# Altium PCB 175-00065revA - PCB, Sinistro Camera Controller Extension.PcbDoc
Units mil, origin at the board's own origin, x right, y up, seen from the top; angles counter-clockwise.
Board outline 6000 x 4000 mil, 2 copper layers (Top Layer, Bottom Layer), stack 12.8 mil thick; 32 components, 37 nets, 107 pads, 0 vias.
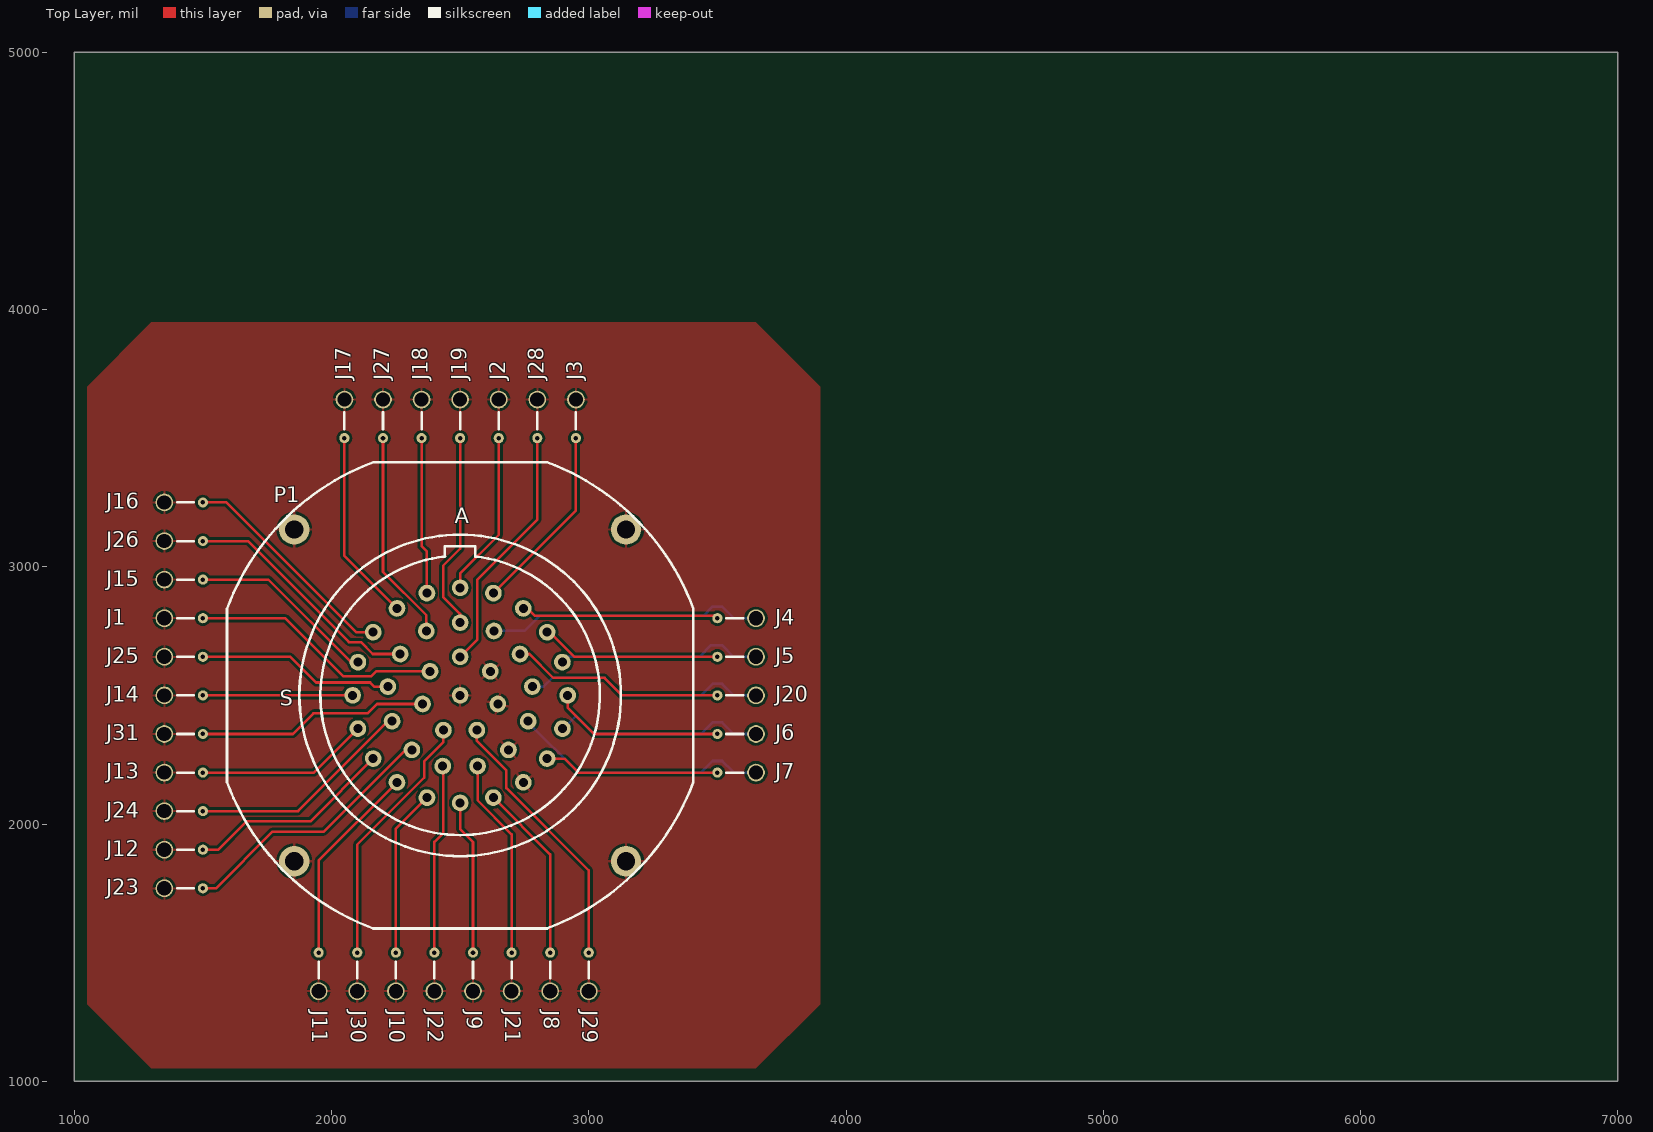
[diagram p0: Top Layer view]
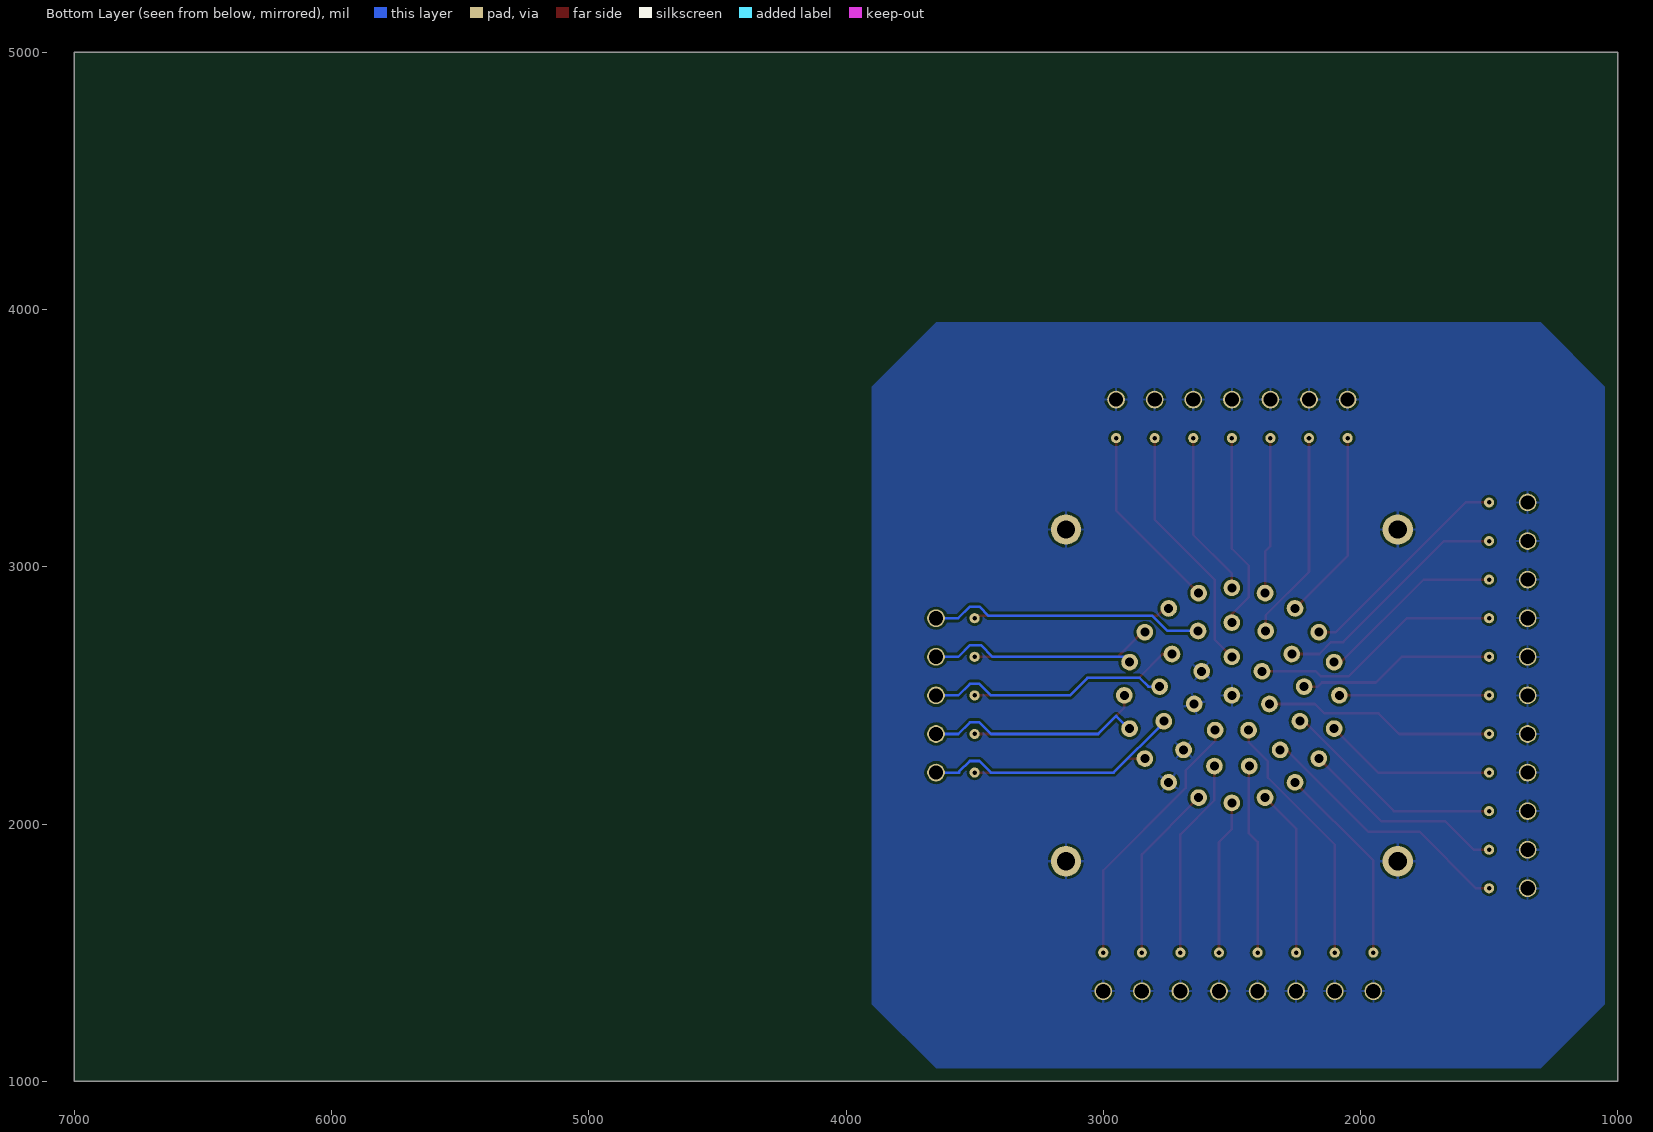
[diagram p1: Bottom Layer view, seen from below]

## Layer stack, top to bottom
Top Solder: solder mask 0.4, Solder Resist, Dk 3.5
Top Layer: signal copper 1.4
Dielectric 1: core 10, FR-4, Dk 4.2
Bottom Layer: signal copper 1.4
Bottom Solder: solder mask 0.4, Solder Resist, Dk 3.5

## Board outline
1000,1000 7000,1000 7000,5000 1000,5000

## Design rules (kind name [scope] priority, off if disabled: settings)
Clearance [All] p1: gap=10
PolygonConnect [All] p1: connectstyle=Relief reliefconductorwidth=10 reliefentries=4 polygonreliefangle="90 Angle" airgapwidth=10
RoomDefinition "780-00059revA - SCH, Sinistro Camera Controller Extension" [InComponentClass('780-00059revA - SCH, Sinistro Camera Controller Extension')] p1: confinementstyle=ConfineIn formatcopy=TRUE lockcomponents=TRUE outline 1000,1000 3950,1000 3950,4000 1000,4000
RoutingVias [All] p1: holewidth=28 width=50 viastyle="Through Hole" minholewidth=28 minwidth=50 maxholewidth=28 maxwidth=50
SolderMaskExpansion [All] p1: expansion=4
Width [All] p1: maxlimit=10 minlimit=10 preferedwidth=10
30 further rules are at their usual default settings.

## Components (designator, comment, footprint, x,y, rotation, side; value= is the part's Value field where it differs from the comment)
J1 "RG-178_CoaxTermination" RG-178_TERMINATION 1350,2800 r0 top
J2 "RG-178_CoaxTermination" RG-178_TERMINATION 2650,3650 r270 top
J3 "RG-178_CoaxTermination" RG-178_TERMINATION 2950,3650 r270 top
J4 "RG-178_CoaxTermination" RG-178_TERMINATION 3650,2800 r180 top
J5 "RG-178_CoaxTermination" RG-178_TERMINATION 3650,2650 r180 top
J6 "RG-178_CoaxTermination" RG-178_TERMINATION 3650,2350 r180 top
J7 "RG-178_CoaxTermination" RG-178_TERMINATION 3650,2200 r180 top
J8 "RG-178_CoaxTermination" RG-178_TERMINATION 2850,1350 r90 top
J9 "RG-178_CoaxTermination" RG-178_TERMINATION 2550,1350 r90 top
J10 "RG-178_CoaxTermination" RG-178_TERMINATION 2250,1350 r90 top
J11 "RG-178_CoaxTermination" RG-178_TERMINATION 1950,1350 r90 top
J12 "RG-178_CoaxTermination" RG-178_TERMINATION 1350,1900 r0 top
J13 "RG-178_CoaxTermination" RG-178_TERMINATION 1350,2200 r0 top
J14 "RG-178_CoaxTermination" RG-178_TERMINATION 1350,2500 r0 top
J15 "RG-178_CoaxTermination" RG-178_TERMINATION 1350,2950 r0 top
J16 "RG-178_CoaxTermination" RG-178_TERMINATION 1350,3250 r0 top
J17 "RG-178_CoaxTermination" RG-178_TERMINATION 2050,3650 r270 top
J18 "RG-178_CoaxTermination" RG-178_TERMINATION 2350,3650 r270 top
J19 "RG-178_CoaxTermination" RG-178_TERMINATION 2500,3650 r270 top
J20 "RG-178_CoaxTermination" RG-178_TERMINATION 3650,2500 r180 top
J21 "RG-178_CoaxTermination" RG-178_TERMINATION 2700,1350 r90 top
J22 "RG-178_CoaxTermination" RG-178_TERMINATION 2400,1350 r90 top
J23 "RG-178_CoaxTermination" RG-178_TERMINATION 1350,1750 r0 top
J24 "RG-178_CoaxTermination" RG-178_TERMINATION 1350,2050 r0 top
J25 "RG-178_CoaxTermination" RG-178_TERMINATION 1350,2650 r0 top
J26 "RG-178_CoaxTermination" RG-178_TERMINATION 1350,3100 r0 top
J27 "RG-178_CoaxTermination" RG-178_TERMINATION 2200,3650 r270 top
J28 "RG-178_CoaxTermination" RG-178_TERMINATION 2800,3650 r270 top
J29 "RG-178_CoaxTermination" RG-178_TERMINATION 3000,1350 r90 top
J30 "RG-178_CoaxTermination" RG-178_TERMINATION 2100,1350 r90 top
J31 "RG-178_CoaxTermination" RG-178_TERMINATION 1350,2350 r0 top
P1 "125-00409 - MIL-DTL-26482 20-41 Pins, Jam nut" "MS-3116 Size 20-41, Male" 2500,2500 r0 top

## Footprints (in the part's own frame and the unit in brackets; to place one, negate y for a bottom-side part, rotate by r counter-clockwise, add the part's x,y. Pads: shape width x height; smd on the part's side, far side on the other; paste and mask are expansions set on the pad)
"MS-3116 Size 20-41, Male" [mil] "Round Size 20, 41 pos, Male Pins"
  round 65 hole 35: A(0,418) aa(280.94,34.1) B(129.17,397.54) bb(264.6,-100.37) C(245.69,338.17) cc(187.65,-211.84) D(338.17,245.69) dd(67.72,-274.78) E(397.54,129.17) ee(-67.74,-274.77) F(418,0) ff(-187.67,-211.82) G(397.54,-129.17) gg(-264.61,-100.35) H(338.17,-245.69) hh(-280.94,34.12) ii(-232.9,160.76) J(245.69,-338.17) jj(-131.52,250.58) K(129.17,-397.54) kk(0,150) L(0,-418) M(-129.17,-397.54) mm(117.28,93.52) N(-245.69,-338.17) nn(146.24,-33.39) P(-338.17,-245.69) pp(65.08,-135.15) qq(-65.09,-135.14) R(-397.54,-129.17) rr(-146.24,-33.38) S(-418,0) ss(-117.27,93.52) T(-397.54,129.17) tt(0,0) U(-338.17,245.69) V(-245.69,338.17) W(-129.17,397.54) X(0,283) Y(131.53,250.58) Z(232.91,160.75)
  round 118.11 / inner round 60 / far side round 118.11 hole 70.87: cs1(-644.88,-644.88) cs2(644.88,-644.88) cs3(644.88,644.88) cs4(-644.88,644.88)
  silkscreen extent -906,-906 906,906
RG-178_TERMINATION [mm] "RG-178 Solder Termination in a PCB"
  round 1 / inner round 1.524 / far side round 1 hole 0.45: 1(3.81,0)
  round 1.75 / inner round 1.524 / far side round 1.75 hole 1.4: GND(0,0)
  silkscreen extent 1.27,0 2.92,0

## Part data
J1: "Coax termination"

## Nets (pads, with @x,y where several pads share a name; then routed paths per layer and width w, separated by ;. In a path a pad name is that pad's centre, name@x,y a point inside that pad or via, vN(x,y) a via of type N, cw(c..) or ccw(c..) an arc to the next point about the centre after c; other vN are vias at no path point)
A1_OUT: J3.1 P1.B | length 735.4
  Top Layer w10: P1.B 2950,3218.37 J3.1
A2_OUT: J18.1 P1.W | length 611.1
  Top Layer w10: J18.1 2350,3080 2370.83,3059.17 P1.W
A3_OUT: J27.1 P1.jj | length 819.2
  Top Layer w10: J27.1 2200,2980 2368.48,2811.52 P1.jj
A4_OUT: J28.1 P1.kk | length 974.3
  Top Layer w10: P1.kk 2566,2716 2566,2949 2800,3183 J28.1
COLDBLK_+: J20.1 P1.Z | length 833.7
  Top Layer w10: P1.Z 2769.25,2660.75 2862,2568 3062,2568 3130,2500 J20.1
COLDBLK_-: J20.GND P1.aa | length 948.6
  Bottom Layer w10: P1.aa 2824.1,2534.1 2858,2568 3062,2568 3130,2500 3436.36,2500 3481.36,2545 3518.64,2545 3563.64,2500 J20.GND
GND: J1.GND J2.GND J3.GND J8.GND J9.GND J10.GND J11.GND J12.GND J13.GND J14.GND J15.GND J16.GND J17.GND J18.GND J19.GND J21.GND J22.GND J23.GND J24.GND J25.GND J26.GND J27.GND J28.GND J29.GND J30.GND J31.GND P1.cc P1.cs1 P1.cs2 P1.cs3 P1.cs4 P1.J P1.mm P1.nn P1.tt
HEATER_+: J4.1 P1.C | length 770.1
  Top Layer w10: P1.C 2761.83,2838.17 2791,2809 3491,2809 J4.1
HEATER_-: J4.GND P1.Y | length 1076.2
  Bottom Layer w10: P1.Y 2750.58,2750.58 2809,2809 3445.36,2809 3481.36,2845 3518.64,2845 3563.64,2800 J4.GND
OD: J19.1 P1.X | length 771.7
  Top Layer w10: P1.X 2500,2817 2434,2883 2434,3004 2500,3070 J19.1
OG: J2.1 P1.A | length 644.1
  Top Layer w10: P1.A 2500,2974 2650,3124 J2.1
P1A: J16.1 P1.U | length 870.7
  Top Layer w10: J16.1 1591,3250 2095.31,2745.69 P1.U
P1B: J15.1 P1.T | length 735.4
  Top Layer w10: J15.1 1754,2950 2074.83,2629.17 P1.T
P2A: J26.1 P1.ii | length 949
  Top Layer w10: J26.1 1675,3100 2068,2707 2114,2707 2160.24,2660.76 P1.ii
P2B: J25.1 P1.hh | length 767.1
  Top Layer w10: J25.1 1840,2650 1940,2550 2150,2550 2165.88,2534.12 P1.hh
P3A: J1.1 P1.ss | length 983.6
  Top Layer w10: J1.1 1820,2800 2045,2575 2155,2575 2173.52,2593.52 P1.ss
P3B: J31.1 P1.rr | length 902.1
  Top Layer w10: J31.1 1850,2350 1930,2430 2140,2430 2176.62,2466.62 P1.rr
RD: J17.1 P1.V | length 746.5
  Top Layer w10: J17.1 2050,3042.47 P1.V
RG: J10.1 P1.M | length 652.5
  Top Layer w10: J10.1 2250,1981.63 P1.M
RTD_CB_+: J7.1 P1.H | length 684.3
  Top Layer w10: P1.H 2905.34,2254.31 2959.65,2200 J7.1
RTD_CB_-: J7.GND P1.bb | length 1010.2
  Bottom Layer w10: P1.bb 2764.6,2395.05 2959.65,2200 3436.36,2200 3481.36,2245 3518.64,2245 3560,2203.64 3560,2200 J7.GND
RTDF_+: J6.1 P1.F | length 672.2
  Top Layer w10: P1.F 2918,2452 3020,2350 J6.1
RTDF_-: J6.GND P1.G | length 834.2
  Bottom Layer w10: P1.G@2897.54,2382.54 2912.54,2382.54 2950,2420 3020,2350 3436.36,2350 3481.36,2395 3518.64,2395 3563.64,2350 J6.GND
RTDS_+: J5.1 P1.D | length 701.5
  Top Layer w10: P1.D 2848.19,2745.69 2943.89,2650 J5.1
RTDS_-: J5.GND P1.E | length 770.1
  Top Layer w10: P1.E P1.E@2898.37,2630
  Bottom Layer w10: P1.E@2918.37,2650 3430,2650 3475,2695 3518.64,2695 3563.64,2650 J5.GND
S1Q1: J8.1 P1.K | length 693.9
  Top Layer w10: P1.K 2850,1881.63 J8.1
S1Q2: J9.1 P1.L | length 602.7
  Top Layer w10: P1.L 2500,1980 2550,1930 J9.1
S1Q3: J13.1 P1.R | length 673.2
  Top Layer w10: J13.1 1931.63,2200 P1.R
S1Q4: J14.1 P1.S | length 582
  Top Layer w10: J14.1 P1.S
S2Q1: J21.1 P1.dd | length 780
  Top Layer w10: P1.dd 2567.72,2092.28 2700,1960 J21.1
S2Q2: J22.1 P1.ee | length 742.1
  Top Layer w10: J22.1 2400,1930 2435,1965 P1.ee@2435,2219.49 ; P1.ee P1.ee@2438,2219.49
S2Q3: J23.1 P1.ff | length 1035.3
  Top Layer w10: J23.1 1550,1750 1770,1970 1970,1970 2288.18,2288.18 P1.ff
S2Q4: J24.1 P1.gg | length 880.2
  Top Layer w10: J24.1 1870,2050 2219.65,2399.65 P1.gg
S3: J11.1 P1.N | length 787.9
  Top Layer w10: J11.1 1950,1857.53 P1.N
SG: J12.1 P1.P | length 808.6
  Top Layer w10: J12.1 1560,1900 1670,2010 1917.53,2010 P1.P
TGA: J29.1 P1.pp | length 1045
  Top Layer w10: P1.pp 2565.08,2322.86 2680,2207.94 2680,2140 3000,1820 J29.1
TGB: J30.1 P1.qq | length 1003.6
  Top Layer w10: J30.1 2100,1920 2359.83,2179.83 2359.83,2243.83 2434.91,2318.91 P1.qq

## Polygon pours and split planes (outlines as drawn)
GND on Bottom Layer "BottomGroundPour" (solid, remove dead copper, pour order 0): 1300,1050 1050,1300 1050,3700 1300,3950 3650,3950 3900,3700 3900,1300 3650,1050
GND on Top Layer "TopGroundPour" (solid, remove dead copper, pour order 4): 1300,1050 1050,1300 1050,3700 1300,3950 3650,3950 3900,3700 3900,1300 3650,1050

## Text inside footprints (layer, text, board x,y; h text height)
P1: Top Overlay "S" at 1799.06,2460 h60; Top Overlay "A" at 2479.06,3170 h60